# Altium PCB PCB-V1.0.pcbdoc
Units mil, origin at the board's own origin, x right, y up, seen from the top; angles counter-clockwise.
Board outline 5330 x 4015 mil, 2 copper layers (Top Layer, Bottom Layer); 33 components, 42 nets, 179 pads, 19 vias.
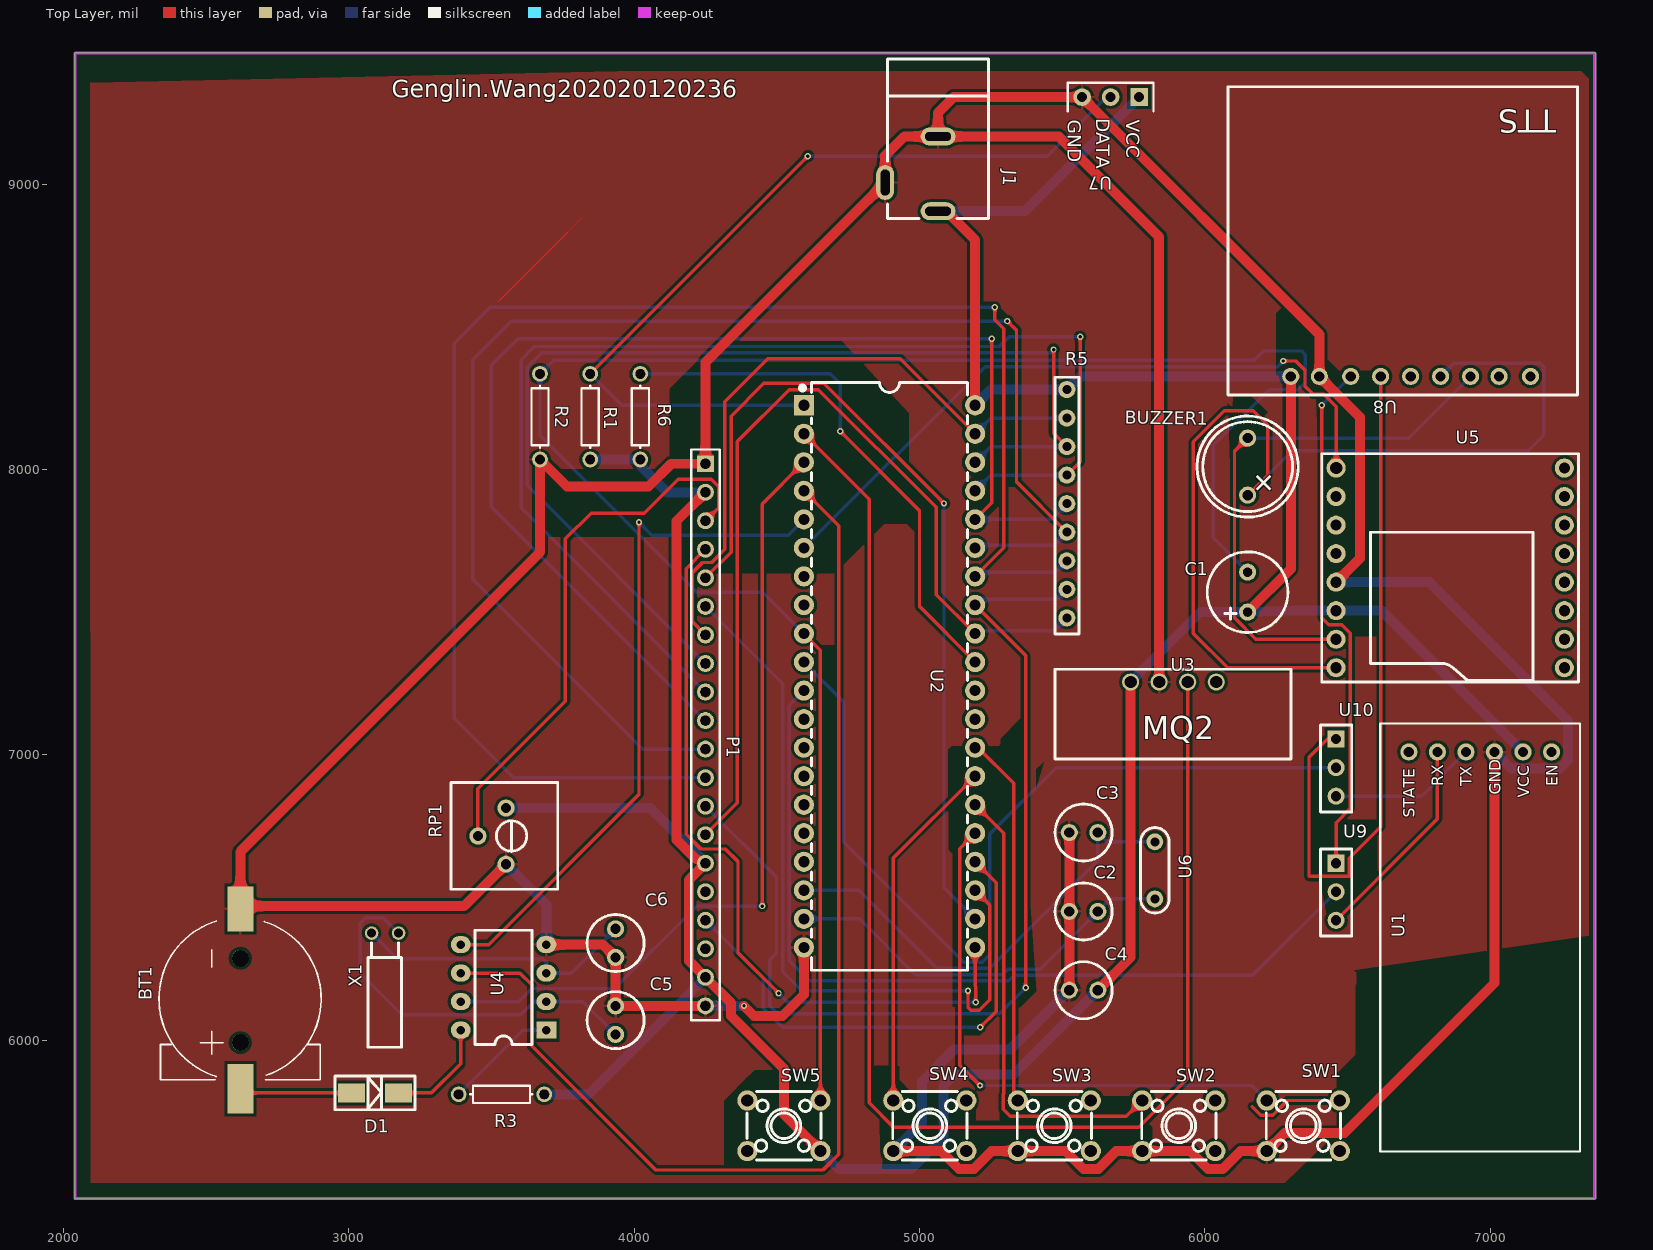
[diagram p0: Top Layer view]
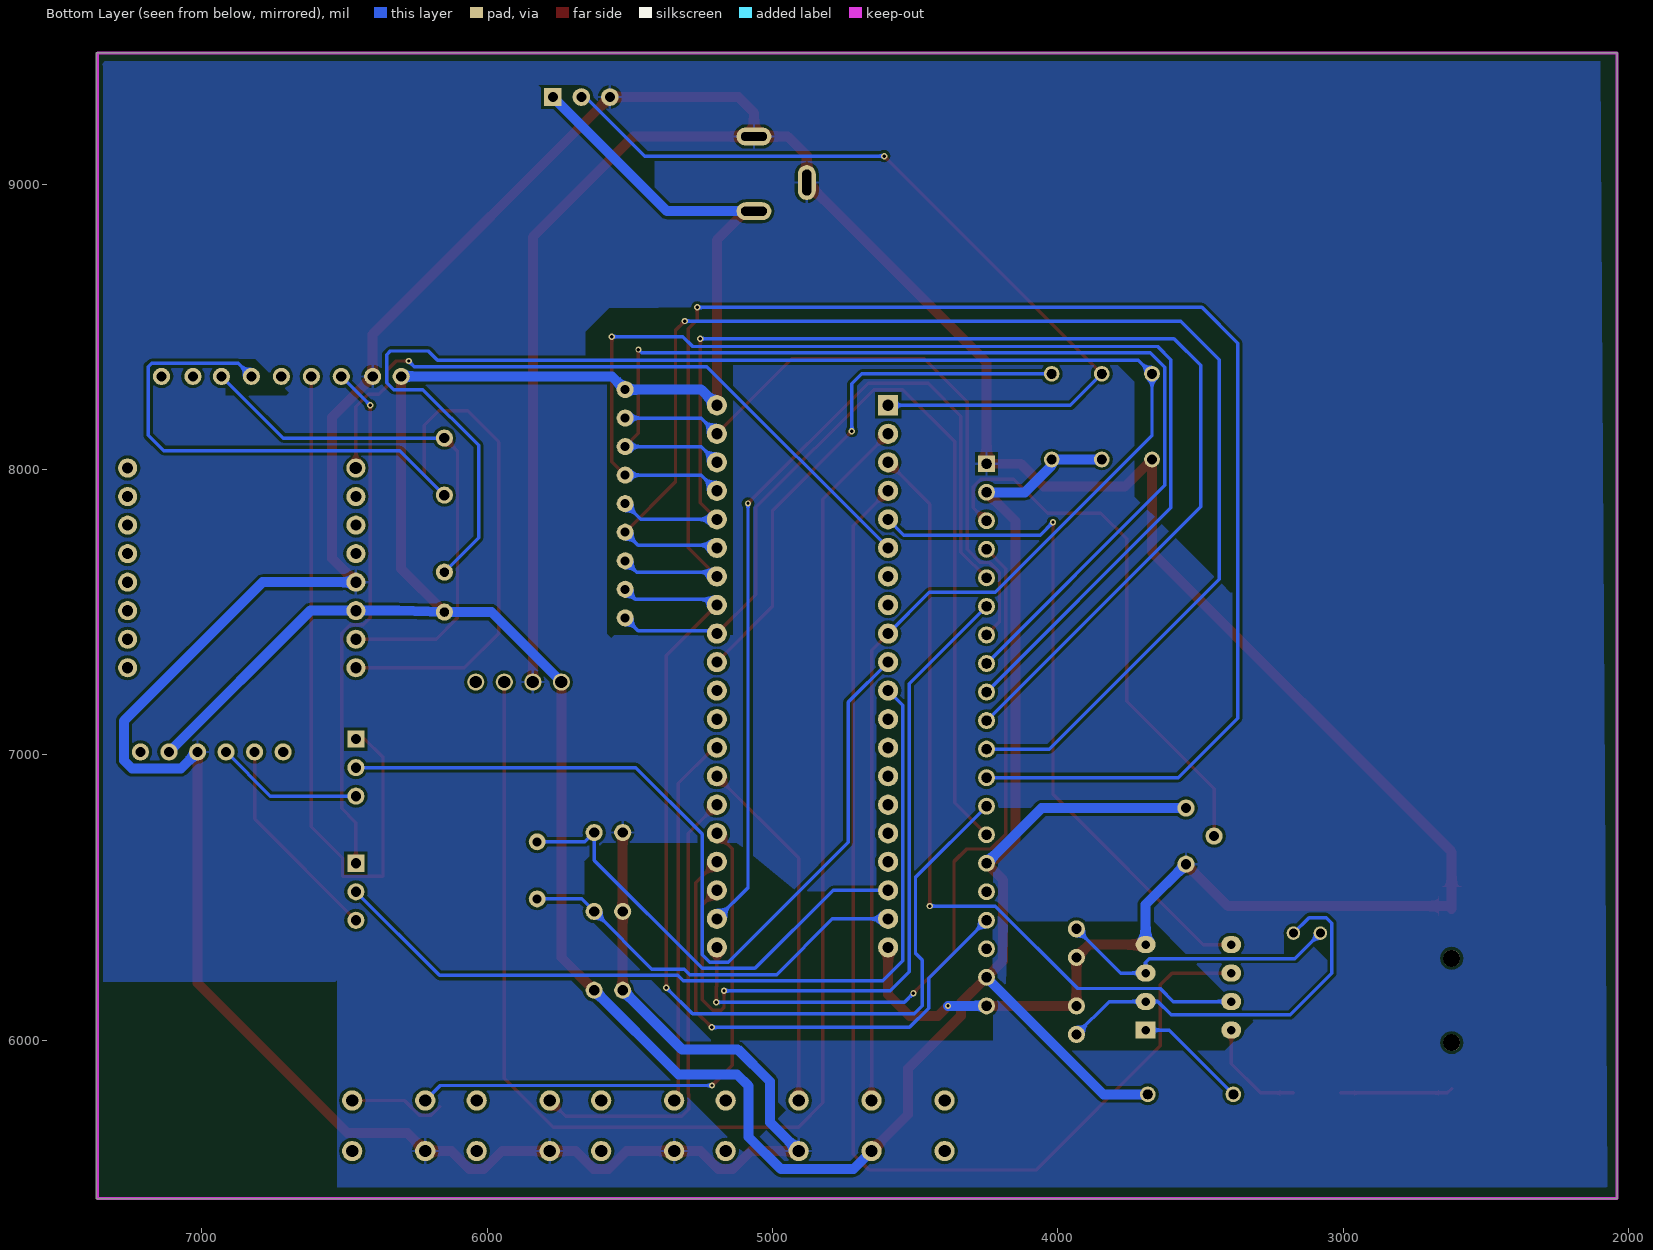
[diagram p1: Bottom Layer view, seen from below]

## Layer stack, top to bottom
Top Solder: solder mask 0.4, Solder Resist, Dk 3.5
Top Layer: signal copper 1.4
Dielectric1: dielectric 12.6, FR-4, Dk 4.8
Bottom Layer: signal copper 1.4
Bottom Solder: solder mask 0.4, Solder Resist, Dk 3.5

## Board outline
2040,5445 2040,9460 7370,9460 7370,5445

## Design rules (kind name [scope] priority, off if disabled: settings)
Clearance [All] p1: gap=10 ignorepadtopadclearanceinfootprint=FALSE except(0: Arc-Hole Track-Hole SMDPad-Hole THPad-Hole Via-Hole Fill-Hole Poly-Hole Region-Hole Text-Hole)
PlaneClearance [All] p1: clearance=8
PolygonConnect [All] p1: connectstyle=Relief reliefconductorwidth=10 reliefentries=4 polygonreliefangle="90 Angle" airgapwidth=10
RoutingVias [All] p1: holewidth=12 width=22 viastyle="Through Hole" minholewidth=12 minwidth=22 maxholewidth=12 maxwidth=22
SilkToSolderMaskClearance [IsPad] p1: minsilkscreentomaskgap=2 clearancetoexposedcopper=TRUE
SolderMaskExpansion [All] p1: expansion=4
Width PWR [InNet('VCC')] p1: maxlimit=60 minlimit=30 preferedwidth=35
Width GND [InNet('GND')] p2: maxlimit=60 minlimit=30 preferedwidth=35
Width [All] p3: maxlimit=15 minlimit=10 preferedwidth=12 minimp=50.000000 maximp=50.000000 favimp=50.000000
28 further rules are at their usual default settings.

## Components (designator, comment, footprint, x,y, rotation, side; value= is the part's Value field where it differs from the comment)
BT1 "1056" BAT-SMD_CR1220-2 2620,6145 r90 top
BUZZER1 "喇叭8欧阻抗" GMD0955YB-9MM 6150,8010 r180 top
C1 "10u" ?#1 6150,7570 r180 top
C2 "20p" ?#2 5575,6451.25 r0 top
C3 "20p" ?#2 5575,6727.5 r0 top
C4 "0.1u" ?#2 5575,6175 r180 top
C5 "20p" ?#2 3935,6070 r270 top
C6 "20p" ?#2 3935,6340 r90 top
D1 "二极管" ?#3 3091.8,5815 r180 top
J1 "DC-005C-20A" DC-IN-TH_DC-005C-20A 4972.48,9035.91 r270 top
P1 "LCD12864" LCD12864 4250,7120 r270 top
R1 "4.7k" ?#4 3850.93,8035 r270 top
R2 "4.7k" ?#4 3665,8335 r90 top
R3 "1k" ?#4 3385,5805 r180 top
R5 "SIP-8" ?#5 5516.34,8280 r0 top
R6 "4.7k" ?#4 4026.85,8035 r270 top
RP1 "10k" RES-ADJ-TH_3386P 3501.78,6715 r90 top
SW1 "K2-1102DP-C4SW-04" KEY-TH_4P-L6.0-W6.0-P4.50-LS6.5 6345,5700 r0 top
SW2 "K2-1102DP-C4SW-04" KEY-TH_4P-L6.0-W6.0-P4.50-LS6.5 5908.75,5700 r0 top
SW3 "K2-1102DP-C4SW-04" KEY-TH_4P-L6.0-W6.0-P4.50-LS6.5 5472.5,5700 r0 top
SW4 "K2-1102DP-C4SW-04" KEY-TH_4P-L6.0-W6.0-P4.50-LS6.5 5036.25,5700 r0 top
SW5 "K2-1102DP-C4SW-04" KEY-TH_4P-L6.0-W6.0-P4.50-LS6.5 4525,5700 r0 top
U1 "HC06蓝牙模块" HC06-BLUETOOTH 7015,6310 r90 top
U2 "STC89C516RD+40I-PDIP40" DIP-40_L52.3-W13.9-P2.54-LS15.2-BL 4895,7275 r270 top
U3 "MQ2" ?#6 5890,7255 r0 top
U4 "DS1302" DS1302-DIP8 3727.44,6005 r90 top
U5 "JQ8900-16P" ?#7 6860,7655 r0 top
U6 "晶振" ?#8 5825,6495 r90 top
U7 "DHT11温湿度传感器" ?#9 5670,9305 r180 top
U8 "TTS_2.0" TTS_2.0_NEW 6076.22,9341 r180 top
U9 "排针3pinRX" ?#10 6460,6520 r0 top
U10 "排针3pinTX" ?#10 6460,6955 r0 top
X1 "32.768KHz" ?#11 3127.24,6375 r90 top

## Footprints (in the part's own frame and the unit in brackets; to place one, negate y for a bottom-side part, rotate by r counter-clockwise, add the part's x,y. Pads: shape width x height; smd on the part's side, far side on the other; paste and mask are expansions set on the pad)
BAT-SMD_CR1220-2 [mm]
  rect 4.4x2.3 smd: 1(-8,0)
  rect 4x2.3 smd: 2(8,0)
  round 1.5 hole 1.5 unplated: ""(-3.9,0) ""(3.6,0)
  silkscreen extent -7.22,-7.19 6.92,7.25
DC-IN-TH_DC-005C-20A [mm]
  oval 1.6x3.1 hole 0.8 slot 2.3 at 90 deg: 1(3.325,2.35) 2(-3.326,2.35)
  oval 3.1x1.6 hole 0.8 slot 2.3 at 0 deg: 3(0.774,-2.351)
  silkscreen extent -10.23,-2.15 3.97,6.85
DIP-40_L52.3-W13.9-P2.54-LS15.2-BL [mm]
  rect 1.8x1.8 hole 1: 1(-24.13,-7.62)
  round 1.8 hole 1: 2(-21.59,-7.62) 3(-19.05,-7.62) 4(-16.51,-7.62) 5(-13.97,-7.62) 6(-11.43,-7.62) 7(-8.89,-7.62) 8(-6.35,-7.62) 9(-3.81,-7.62) 10(-1.27,-7.62) 11(1.27,-7.62) 12(3.81,-7.62) 13(6.35,-7.62) 14(8.89,-7.62) 15(11.43,-7.62) 16(13.97,-7.62) 17(16.51,-7.62) 18(19.05,-7.62) 19(21.59,-7.62) 20(24.13,-7.62) 21(24.13,7.62) 22(21.59,7.62) 23(19.05,7.62) 24(16.51,7.62) 25(13.97,7.62) 26(11.43,7.62) 27(8.89,7.62) 28(6.35,7.62) 29(3.81,7.62) 30(1.27,7.62) 31(-1.27,7.62) 32(-3.81,7.62) 33(-6.35,7.62) 34(-8.89,7.62) 35(-11.43,7.62) 36(-13.97,7.62) 37(-16.51,7.62) 38(-19.05,7.62) 39(-21.59,7.62) 40(-24.13,7.62)
  silkscreen extent -26.16,-7.95 26.16,6.93
DS1302-DIP8 [mil]
  rect 60x70.87 hole 30: 1(30,35)
  oval 60x70 hole 30: 2(130,35) 3(230,35) 4(330,35) 5(330,335) 6(230,335) 7(130,335) 8(30,335)
  silkscreen extent -20,85 380,285
GMD0955YB-9MM [mil]
  round 60 hole 36: 1(0,100) 2(0,-100)
  silkscreen extent -177,-177 177,177
HC06-BLUETOOTH [mil]
  round 60 hole 36: 1(700,-200) 2(700,-100) 3(700,0) 4(700,100) 5(700,200) 6(700,300)
  silkscreen extent -700,-300 800,400
KEY-TH_4P-L6.0-W6.0-P4.50-LS6.5 [mm]
  round 1.8 hole 1.1: 1(-3.251,-2.25) 2(3.251,-2.25) 3(3.251,2.25) 4(-3.251,2.25)
  silkscreen extent -3.3,-3.05 3.3,3.05
LCD12864 [mil]
  rect 59.06x59.06 hole 35.44 slot 35.45 at 0 deg: 1(-900,0)
  round 59.06 hole 35.44 slot 35.45 at 0 deg: 2(-800,0) 3(-700,0) 4(-600,0) 5(-500,0) 6(-400,0) 7(-300,0) 8(-200,0) 9(-100,0) 10(0,0) 11(100,0) 12(200,0) 13(300,0) 14(400,0) 15(500,0) 16(600,0) 17(700,0) 18(800,0) 19(900,0) 20(1000,0)
  silkscreen extent -950,-50 1050,50
RES-ADJ-TH_3386P [mil]
  round 60 hole 35.43: 1(98.43,-49.21) 2(0.01,49.22) 3(-98.42,-49.21)
  silkscreen extent -186,-231 188,143
TTS_2.0_NEW [mil]
?#1 [mil]
  round 60 hole 31.5 slot 31.7 at 0 deg: 1(0,70) 2(0,-70)
  silkscreen extent -141,-141 141,141
?#2 [mil]
  round 60 hole 36: 1(-50,0) 2(50,0)
  silkscreen extent -100,-100 100,100
?#3 [mil]
  rect 94.49x66.93 smd: 1(82.68,0) 2(-82.68,0)
  silkscreen extent -140,-59 140,59
?#4 [mil]
  round 55.12 hole 33.46 slot 33.66 at 0 deg: 1(-300,-5) 2(0,-5)
  silkscreen extent -259,-35 -41,25
?#5 [mil]
  round 60 hole 31.5: 1(0,0) 2(0,-100) 3(0,-200) 4(0,-300) 5(0,-400) 6(0,-500) 7(0,-600) 8(0,-700) 9(0,-800)
  silkscreen extent -41,-856 43,43
?#6 [mil]
  round 60 hole 43.31: 1(-150,0) 2(-50,0) 3(50,0) 4(150,0)
  silkscreen extent -415,-270 412,45
?#7 [mil]
  round 66.93 hole 43.31: 1(-400,350)
  round 66.93 hole 39.37: 2(-400,250) 3(-400,150) 4(-400,50) 5(-400,-50) 6(-400,-150) 7(-400,-250) 8(-400,-350) 9(400,-350) 10(400,-250) 11(400,-150) 12(400,-50) 13(400,50) 14(400,150) 15(400,250) 16(400,350)
  silkscreen extent -450,-400 450,400
?#8 [mil]
  round 59.05 hole 31.5: 1(0,0) 2(200,0)
  silkscreen extent -50,-50 250,50
?#9 [mil]
  rect 62x62 hole 35: 1(-100,0)
  round 62 hole 35: 2(0,0) 3(100,0)
  silkscreen extent -150,-50 150,50
?#10 [mil]
  rect 60x60 hole 36: 1(0,100)
  round 60 hole 36: 2(0,0) 3(0,-100)
  silkscreen extent -55,-155 55,150
?#11 [mil]
  round 47.24 hole 31.5: 1(0,47.24) 2(0,-47.24)
  silkscreen extent -400,-58 -34,60

## Free pads (board coordinates)
  round 60 hole 36: 1(6301.22,8326) 2(6401.22,8326) 3(6511.22,8326) 4(6616.22,8326) 5(6721.22,8326) 6(6826.22,8326) 7(6931.22,8326) 8(7031.22,8326) 9(7141.22,8326)

## Via types
v1: diameter 22, hole 12, Top Layer to Bottom Layer, 19 vias

## Nets (pads, with @x,y where several pads share a name; then routed paths per layer and width w, separated by ;. In a path a pad name is that pad's centre, name@x,y a point inside that pad or via, vN(x,y) a via of type N, cw(c..) or ccw(c..) an arc to the next point about the centre after c; other vN are vias at no path point)
BLUERX: U1.5 U9.3 | length 737
  Top Layer w12: U9.3 6815,6775 U1.5
BLUETX: U1.4 U10.3 | length 519.2
  Bottom Layer w12: U10.3 6760,6855 U1.4
BT1_1: BT1.1 D1.1 | length 395.4
  Top Layer w12: BT1.1 2635.04,5815 D1.1
DB0: P1.7 R5.2 U2.39 | length 2295
  Top Layer w12: P1.7 4204.47,7465.53 4204.47,7638.86 4239.61,7674 4272,7674 4318,7720 4318,8238 4468,8388 4932,8388 U2.39
  Bottom Layer w12: U2.39 5250,8180 R5.2
DB1: P1.8 R5.3 U2.38 | length 3869.7
  Top Layer w12: v1(5470,8420) 5470,8126.34 R5.3
  Bottom Layer w12: P1.8 3626,7944 3626,8358.46 3676.54,8409 5459,8409 v1(5470,8420) ; U2.38 5250,8080 R5.3
DB2: P1.9 R5.4 U2.37 | length 4272.9
  Top Layer w12: R5.4 5563,8026.66 v1(5563,8465)
  Bottom Layer w12: P1.9 3604,7866 3604,8384.46 3650.54,8431 5280,8431 5314,8465 v1(5563,8465) ; U2.37 5250,7980 R5.4
DB3: P1.10 R5.5 U2.36 | length 4348.3
  Top Layer w12: U2.36 5253,7883 v1(5253,8458)
  Bottom Layer w12: P1.10 3500,7870 3500,8365 3593,8458 v1(5253,8458) ; U2.36 5461.34,7825 R5.5
DB4: P1.11 R5.6 U2.35 | length 4930.8
  Top Layer w12: v1(5308,8520) 5340,8488 5340,7956.34 R5.6
  Bottom Layer w12: P1.11 4030,7020 3435,7615 3435,8385 3570,8520 v1(5308,8520) ; U2.35 5205,7735 5471.34,7735 R5.6
DB5: P1.12 R5.7 U2.34 | length 5568.3
  Top Layer w12: U2.34 5295,7725 5295,8493 5264,8524 v1(5264,8568)
  Bottom Layer w12: P1.12 3578,6920 3370,7128 3370,8443 3495,8568 v1(5264,8568) ; U2.34 5210,7640 5476.34,7640 R5.7
DB6: P1.13 R5.8 U2.33 | length 3517.9
  Top Layer w12: U2.33 5372,7348 v1(5372,6183.57)
  Bottom Layer w12: P1.13 4499,6571 4499,6305 4475,6281 4475,6121 4504,6092 5280.43,6092 v1(5372,6183.57) ; U2.33 5215,7545 5481.34,7545 R5.8
DB7: P1.14 R5.9 U2.32 | length 3210.3
  Top Layer w12: P1.14 4362,6832 4362,8098 4544,8280 4646,8280 5058.45,7867.55 5058.45,7561.55 U2.32
  Bottom Layer w12: U2.32 5205,7435 5471.34,7435 R5.9
DHT_DAT: R1.1 U2.1 U7.2 | length 3020.5
  Top Layer w12: R1.1 v1(4608.93,9098)
  Bottom Layer w12: R1.1 3955.93,8225 U2.1 ; v1(4608.93,9098) 5448,9098 5655,9305 U7.2
DO: U2.4 U4.6 | length 4134
  Top Layer w12: U4.6 3600,6235 3641,6194 3641,5980 4076,5545 4662,5545 4717,5600 4717,7803 U2.4
GND: BT1.2 C2.1 C3.1 C4.2 C5.1 C6.1 J1.2 J1.3 P1.1 P1.20 pad.2 R2.1 RP1.3 SW1.1 SW2.1 SW3.1 SW4.1 U1.3 U2.20 U3.2 U4.4 U5.5 U7.3 | length 18333.2
  Top Layer w35: RP1.3 3404.41,6470 2630.04,6470 BT1.2 2620,6660 3670,7710 R2.1 3765,7940 4050,7940 4130,8020 P1.1 4250,8375.48 J1.3 4879.93,9099.93 4946.84,9166.84 J1.2 ; U4.4 3890,6335 C6.1 C5.1 P1.20 ; v1(4385,6120) 4420,6085 4520,6085 4595,6160 U2.20 ; SW4.1 5075.25,5611.4 5138.18,5548.47 5190.32,5548.47 5253.25,5611.4 SW3.1 5511.5,5611.4 5574.43,5548.47 5626.57,5548.47 5689.5,5611.4 SW2.1 5947.75,5611.4 6010.68,5548.47 6062.82,5548.47 6125.75,5611.4 SW1.1 6279.93,5674.33 6489.33,5674.33 7015,6200 U1.3 ; C4.2 C2.1 C3.1 ; U3.2 5840,8815 5488.16,9166.84 J1.2 ; U5.5 6542.97,7687.96 6542.97,8184.26 pad.2 6401.22,8473.78 U7.3 5120,9305 5065,9250 J1.2
  Bottom Layer w35: RP1.3 3692.44,6475.12 U4.4 ; P1.20 v1(4385,6120) ; SW4.1 5009,5712.15 5009,5855 5122,5968 5318,5968 C4.2 ; U5.5 6787,7605 7273,7119 7273,6980 7245,6952 7073,6952 U1.3
JQ8900VPP: U2.6 U5.1 | length 2451.4
  Top Layer w12: v1(6275,8380) 6320,8380 6319.5,8379.5 6351,8348 6351,8291.89 6380,8262.89 6416.95,8262.89 6460,8219.84 U5.1
  Bottom Layer w12: U2.6 5230,8360 6255,8360 v1(6275,8380)
MQ_DO: U2.2 U3.3 | length 5050.3
  Top Layer w12: U2.2 4824,7896 4824,5780 4909,5695 5768,5695 5940,5867 U3.3
P1_3: P1.3 RP1.2 | length 1942.3
  Top Layer w12: RP1.2 3452.56,6881 3759,7187.44 3759,7757 3849,7847 4036,7847 4155,7966 4270,7966 4296,7940 4296,7866 P1.3
P2.0: P1.4 U2.21 | length 2664.9
  Top Layer w12: P1.4 4182.47,7652.47 4182.47,6722 4234.47,6670 4320,6670 4364,6626 4364,6306.21 v1(4506.18,6164.03) ; U2.21 5195,6188.82 5197,6186.82 v1(5197,6132.82)
  Bottom Layer w12: v1(4506.18,6164.03) 4537.39,6132.82 v1(5197,6132.82)
P2.1: P1.5 U2.22 | length 3073.4
  Top Layer w12: P1.5 4340,7710 4340,8187 4455,8302 4665,8302 v1(5086,7881)
  Bottom Layer w12: v1(5086,7881) 5086,6534 U2.22
P2.2: P1.6 U2.23 | length 2627.5
  Top Layer w12: v1(5170,6173) 5170,6115 5180,6105 5210,6105 5246.43,6141.43 5246.43,6473.57 U2.23
  Bottom Layer w12: P1.6 4521,7249 4521,6240 4588,6173 v1(5170,6173)
P2.3: P1.17 U2.24 | length 1813.3
  Top Layer w12: U2.24 5268.43,6551.57 5268.43,6100.43 v1(5213,6045)
  Bottom Layer w12: P1.17 4453,6217 4453,6111.89 4519.89,6045 v1(5213,6045)
P2.4: SW1.4 U2.25 | length 1962.9
  Top Layer w12: U2.25 5140.5,6670.5 5140.5,5912.5 v1(5212,5841)
  Bottom Layer w12: v1(5212,5841) 6164.6,5841 SW1.4
P2.5: SW2.4 U2.26 | length 1630.7
  Top Layer w12: U2.26 5295,6725 5295,5811.84 5293.07,5809.9 5293.07,5757.37 5317.43,5733 5725.15,5733 SW2.4
P2.6: SW4.4 U2.27 | length 1255.2
  Top Layer w12: SW4.4 4908.25,6638.25 U2.27
P2.7: SW3.4 U2.28 | length 1304.2
  Top Layer w12: U2.28 5205,7025 5330,6900 5330,5803.1 SW3.4
RST: U2.5 U4.5 | length 2415.3
  Top Layer w12: U4.5 3490,6335 4017,6862 v1(4017,7815)
  Bottom Layer w12: v1(4017,7815) 4062,7770 4540,7770 U2.5
RX: U2.10 U10.2 | length 3118.5
  Bottom Layer w12: U2.10 4735,7185 4735,6693 5154.43,6273.57 5220,6273.57 5246.43,6300 5246.43,6722.5 5478.93,6955 U10.2
SCLK: U2.3 U4.7 | length 2810.8
  Top Layer w12: v1(4449,6470) 4449,7879 U2.3
  Bottom Layer w12: U4.7 3595,6135 3641,6181 3931,6181 4220,6470 v1(4449,6470)
SPK+: BUZZER1.1 pad.6 U5.8 | length 3571.5
  Top Layer w12: BUZZER1.1 6220,7980 6220,8155 6170,8205 6068.66,8205 5960,8096.34 5960,7425 6080,7305 U5.8
  Bottom Layer w12: BUZZER1.1 6306,8066 7134,8066 7188,8120 7188,8360 7176,8372 6872.22,8372 pad.6
SPK-: BUZZER1.2 pad.7 U5.7 | length 1906.8
  Top Layer w12: BUZZER1.2 6104,8064 6104,7480 6179,7405 U5.7
  Bottom Layer w12: BUZZER1.2 6715.22,8110 pad.7
TTSRX: pad.3 U9.1 | length 1836.7
  Top Layer w12: v1(6410,8224.78) 6410,7480 6434.47,7455.53 6480,7455.53 6510,7425.53 6510,6812 6460,6762 U9.1
  Bottom Layer w12: v1(6410,8224.78) pad.3
TTSTX: pad.4 U10.1 | length 2477.2
  Top Layer w12: U10.1 6429,7055 6365,6991 6365,6574 6506,6574 6506,6638 6616.22,6748.22 pad.4
TX: U2.11 U9.2 | length 3044.1
  Bottom Layer w12: U2.11 4543,7173 4543,6278 4613.43,6207.57 5312.43,6207.57 5331.98,6227.11 6167.11,6227.11 U9.2
U2_9: C1.2 R2.2 SW5.3 U2.9 | length 6814.4
  Top Layer w12: U2.9 4653,7367 SW5.3
  Bottom Layer w12: U2.9 4450,7570 4220,7570 3670,8120 R2.2 3718,8383 6174,8383 6206,8415 6315.03,8415 6339,8415 6352.24,8401.76 6352.24,8304.24 6328,8280 6225.16,8280 6030,8084.84 6030,7760 C1.2
U2_18: C3.2 U2.18 U6.2 | length 1611.2
  Bottom Layer w12: U2.18 4787.93,6525 5061.36,6251.57 5247,6251.57 5625,6629.57 C3.2 5657.5,6695 U6.2
U2_31: R6.1 U2.31 | length 1885.6
  Top Layer w12: v1(4722,8134) 5000,7856 5000,7520 U2.31
  Bottom Layer w12: R6.1 4687,8335 4722,8300 v1(4722,8134)
U4_1: R3.2 U4.1 | length 400.6
  Bottom Layer w12: R3.2 3610,6035 U4.1
U4_2: C5.2 U4.2 X1.2 | length 1362
  Bottom Layer w12: X1.2 3120,6429.48 3060,6429.48 3040,6409.48 3040,6235 3186,6089 3603,6089 3649,6135 U4.2 3820,6135 C5.2
U4_3: C6.2 U4.3 X1.1 | length 999.2
  Bottom Layer w12: X1.1 3170,6285 3680,6285 3692.44,6272.56 U4.3 3780,6235 C6.2
U4_8: D1.2 U4.8 | length 378
  Top Layer w12: D1.2 3290,5815 3392.44,5917.44 U4.8
U6_1: C2.2 U2.19 U6.1 | length 1420.9
  Bottom Layer w12: U2.19 4790,6425 4985.43,6229.57 5290.43,6229.57 5309.98,6249.11 5422.86,6249.11 C2.2 5668.75,6495 U6.1
VCC: C1.1 C4.1 J1.1 P1.2 P1.15 P1.19 pad.1 R1.2 R3.1 R5.1 R6.2 RP1.1 SW5.2 U1.2 U2.40 U3.1 U5.6 U7.1 | length 12424.6
  Top Layer w35: P1.2 4148.97,7818.97 4148.97,6702 4214.47,6636.5 P1.15 4192,6562 4192,6278 P1.19 4340,6130 4340,6085 4525,5900 4525,5739.4 SW5.2 ; J1.1 5095,8905 5195,8805 U2.40 ; C4.1 5740,6290 U3.1 ; C1.1 6301.22,7651.22 pad.1
  Bottom Layer w35: RP1.1 4056.57,6813.43 P1.15 ; R3.1 3840,5810 P1.19 ; R1.2 R6.2 4021.85,8013.15 4115,7920 P1.2 ; SW5.2 4716.4,5548 4971,5548 5084,5661 5084,5840 5124,5880 5330,5880 C4.1 ; J1.1 5370,8905 U7.1 ; U2.40 5250,8280 R5.1 5562.34,8326 pad.1 ; U3.1 5985,7500 C1.1 6310,7505 U5.6 6620,7505 U1.2
pads on no net: BT1. P1.16 P1.18 SW1.2 SW1.3 SW2.2 SW2.3 SW3.2 SW3.3 SW4.2 SW4.3 SW5.1 SW5.4 U1.1 U1.6 U2.7 U2.8 U2.12 U2.13 U2.14 U2.15 U2.16 U2.17 U2.29 U2.30 U3.4 U5.2 U5.3 U5.4 U5.9 U5.10 U5.11 U5.12 U5.13 U5.14 U5.15 U5.16
copper on no net: | length 341.2
  Top Layer w12: 6165.57,5767.3 6195.7,5737.17 6238.3,5737.17 6289.74,5788.6 6473,5788.6

## Polygon pours and split planes (outlines as drawn)
GND on Top Layer "Top Layer-GND" (solid, pour order 38): 3940,9395 2093.37,9355 2095,5500 2195,5500 7345,5500 7345,9370 7320,9395
no net on Top Layer "Top Layer-No Net 8" (solid, pour order 36): 2110,9435
no net on Top Layer "Top Layer-No Net 1" (solid, pour order 34): 5925,7425
no net on Top Layer "Top Layer-No Net 2" (solid, pour order 22): 2175,6430
no net on Top Layer "Top Layer-No Net 3" (solid, pour order 20): 1895,6280
no net on Top Layer "Top Layer-No Net 4" (solid, pour order 16): 2875,8555
no net on Top Layer "Top Layer-No Net 5" (solid, pour order 12): 1980,6085
no net on Top Layer "Top Layer-No Net 6" (solid, pour order 8): 2265,6350
no net on Top Layer "Top Layer-No Net 7" (solid, pour order 4): 3725,8790 3815,8880 3525,8590
no net on Top Layer "Top Layer-No Net" (solid, pour order 2): 4040,6010
no net on Multi-Layer (solid): 2910,6670
no net on Bottom Overlay (solid): 2085,9425
GND on Bottom Layer "Bottom Layer-GND" (solid, pour order 44): 2100,9430 7340,9430 7350,9420 7345,9415 7345,5485 2080,5485 2075,5480

## Keep-outs
Keep-Out Layer:
  lines w10: 2040,5445 7365,5445 7365,9460 2040,9460 2040,5445

## Other copper
Top Layer:
  pour cut-out: 6521.24,6245 6530,6236.24 6530,5579 7314,5579 7445,5710 7445,6381.03
  pour cut-out: 6526.31,6195 6526.31,5948.31 6460,5882 6460,5675 7377.5,5675 7445,5742.5 7400,5787.5 7400,6335
  pour cut-out: 7035.17,6235 7035.17,6210.17 7160.35,6085 7285,6085 7355,6015 7355,5470 6249.91,5470 6239.91,5460
  pour cut-out: 5260,6130.32 5130.32,6130.32 5130,6130 5138.18,6121.82 5138.18,6015 5210.98,6015 5221.19,6025.22
  pour cut-out: 5274.07,7005 5285,7015.93 5285,7056.82 5370,7141.82 5370,6960
  pour cut-out: 5283.78,7850 5283.78,7864.22 5253,7895 5263,7905 5305,7905 5305,7871.03
  pour cut-out: 5275,7964.69 5234.69,7964.69 5162.6,7892.6 5167.26,7887.93 5167.26,7803 5207.73,7803 5286.87,7882.14 5286.87,7963.07
  pour cut-out: 4845,7810 4955,7810 4988.46,7776.54 4988.46,7920
  pour cut-out: 6020,8435.14
  pour cut-out: 6010,8430
  pour cut-out: 6132.5,8458
  pour cut-out: 6272.02,8570 6250,8547.98 6250,8330 6338.19,8330 6380,8371.81 6373.48,8378.32 6373.48,8462.29
  pour cut-out: 4860,5720 5790.07,5720 5815,5695.07 5815,5599.54 4869.94,5599.54 4863.08,5606.4
  pour cut-out: 4875,5875 4915.95,5875 4972.04,5818.91 5198.26,5818.91 5198.26,5561.74 5205,5555 5200,5550 4870,5550
  pour cut-out: 4675,5875 4401.53,5875 4315,5788.47 4315,5550 4320,5545 4330,5555 4672,5555
  pour cut-out: 6420.84,8395 6469.66,8346.17 6618.83,8346.17 6640,8325 6620,8305 6620,7413.46 6463.46,7413.46 6450,7400
  pour cut-out: 4995,7963.07 4915,7963.07 4915,7915.78 4995.78,7835 5000,7835 5000,7520 5162.6,7357.4 5170,7357.4 5170,7440 5185,7455 5078.45,7561.55 5058.45,7561.55 5058.45,7892.69 5055,7896.14
  pour cut-out: 3670,8000 4135,8000 4148.97,7986.03 4148.97,7765 3661.49,7765 3655,7758.51
  pour cut-out: 4728.31,8450 4291.69,8450 4124.54,8282.85 4124.54,7635.22 4702.11,7635.22 4961.64,7894.74 4961.64,8197.22
  pour cut-out: 4720,5725.53 4722,5727.53 4722,5895 4423.54,5895 4373.54,5845 4663.54,5555 4705,5555
  pour cut-out: 4722,7385.47 4630,7385.47 4660,7355.47 4660,5809.9 4710.38,5809.9 4722,5798.28
  pour cut-out: 5360,6832 5360,6980.74 5258.25,6980.74 5257.5,6981.49 5246.43,6970.42 5246.43,6792.6
  pour cut-out: 5360,6992.6 5329.26,6992.6 5285,7036.86 5278.14,7030 5112.41,7030 5100,7017.59 5100,6667.41 5155,6612.41
  pour cut-out: 5435,6973.76 5410,6948.76 5410,6885.31
  pour cut-out: 5352.22,6975 5352.22,6917.22 5115,6680 5115,6115 5353.51,6115 5410,6171.49
  pour cut-out: 4824,5905 4829,5910 4930,5910 4930,5714.89 4920.11,5705 4838.35,5786.76 4815,5786.76
  pour cut-out: 5780.75,5803.1 5289.63,5803.1 5280,5793.47 5280,5685 5777.93,5685 5795,5702.07
  pour cut-out: 6582.48,6530.44 6585,6532.96 6585,6605 6572.63,6605 6425,6457.37 6460,6422.37 6460,6399.83
  pour cut-out: 6365,6775 6607.85,6775 6615,6767.85 6605,6757.85 6605,6552.69 6559.96,6552.69 6430,6422.72
  pour cut-out: 6443.69,7075 6443.69,7058.69 6358.76,6973.76 6358.76,6770 6468,6770 6510,6812 6510,7065
  pour cut-out: 6416.95,8140 6496.95,8060 6539.75,8060 6539.75,7526.1 6433.65,7420 6405,7420
  pour cut-out: 6100,8255 6165,8255 6220,8200 6195,8175 6195,8130 6099.32,8130 6092.46,8136.86
  pour cut-out: 6080.35,8230 6143.81,8166.54 6231.54,8166.54 6231.54,7951.88 6222.62,7942.97 6090,7942.97
  pour cut-out: 6388.59,8275 6395,8275 6550,8120 6485,8055 6485,7990.16 6393.69,8081.47
  pour cut-out: 5215,8587.78 5261.53,8587.78 5356.34,8492.98 5356.34,7940 5217.4,7940 5167.26,7990.14 5167.26,8495
Bottom Layer:
  pour cut-out: 6525,6212.04 6532.04,6205 7350,6205 7350,5460 6525,5460
  pour cut-out: 4617.91,7185.31 4563.16,7185.31 4553.47,7195 4530,7171.53 4530,6500.06 4607.24,6500.06 4625,6482.3 4635,6492.3 4635,7195
  pour cut-out: 5160,8383 5140,8363 5140,7420 5555,7420 5565,7410 5580,7425 5580,8395
  pour cut-out: 5820,9346.35 5670,9346.35 5415,9091.35 5415,8920
  pour cut-out: 3190,6358.04 3108.04,6440 3047.45,6440 3028.46,6421.02 3040,6409.48 3040,6265 3040.99,6265 3105.99,6330 3145,6330 3190,6285 3207.24,6302.24 3207.24,6366.22
  pour cut-out: 6915,8387.07 6813.61,8387.07 6695,8268.46 6703.46,8260 6916.92,8260 6916.92,8307.44 6965.16,8355.69
  pour cut-out: 6340,8366.35 6338.65,8365 5180,8365 5180,8280.75 5209.25,8310 6328,8310
  pour cut-out: 5570,6191.76 5541.73,6191.76 5279.97,5930 5274.97,5935 5055,5935 5055,5856.58 4953.42,5755 5098.42,5610 5105,5610 5715,6220
  pour cut-out: 4920.11,6525 4915.11,6520 4499,6520 4499,6552.19 4221.19,6830 4204.61,6813.43 4014.58,6813.43 4235,6593 4228.53,6586.54 4228.53,6000 5215,6000 5657.5,6442.5 5657.5,6622.56 5659.94,6625 5594.94,6690 5125,6690
  pour cut-out: 4175,6415 3665,6415 3315,6065 3415,5965 4035.5,5965 4185,6114.5
  pour cut-out: 5255,8568 5238.69,8551.69 3501.69,8551.69 3370,8420 3370,7570 3396.09,7570 3730,7903.91 3730,8306.69 3793.31,8370 5655,8370 5655,8481.81 5571.81,8565 5510,8565

## Silkscreen, mask and mechanical layers (free items; w line width, h text height)
Top Overlay:
  pour cut-out: 3905,6415 3840,6350 3910,6350 3925,6335 3930,6335 3960,6365
  lines w10: 6081.22,8261 6081.22,9341 7306.22,9341 7306.22,8261 6081.22,8261
  text "Genglin.Wang202020120236" at 3150,9305 h60
  text "TTS" at 7231.22,9261 h80 r180

## Text inside footprints (layer, text, board x,y; h text height)
BUZZER1: Top Overlay "+" at 6215,8010 h80 r225
U1: Top Overlay "VCC" at 7136.19,6850 h39.37 r90; Top Overlay "GND" at 7036.19,6860 h39.37 r90; Top Overlay "TX" at 6936.2,6889.66 h39.37 r90; Top Overlay "RX" at 6836.32,6890.34 h39.37 r90; Top Overlay "EN" at 7236.19,6890 h39.37 r90; Top Overlay "STATE" at 6736.19,6780 h39.37 r90
U7: Top Overlay "VCC" at 5725,9225 h47.24 r270; Top Overlay "DATA" at 5620,9230 h47.24 r270; Top Overlay "GND" at 5520,9225 h47.24 r270